# Altium PCB PCB1.PcbDoc
Units mil, origin at the board's own origin, x right, y up, seen from the top; angles counter-clockwise.
Board outline 6000 x 4000 mil, 2 copper layers (Top Layer, Bottom Layer); 46 components, 103 nets, 210 pads, 0 vias.
Unrouted connection lines stored in the file: 99.
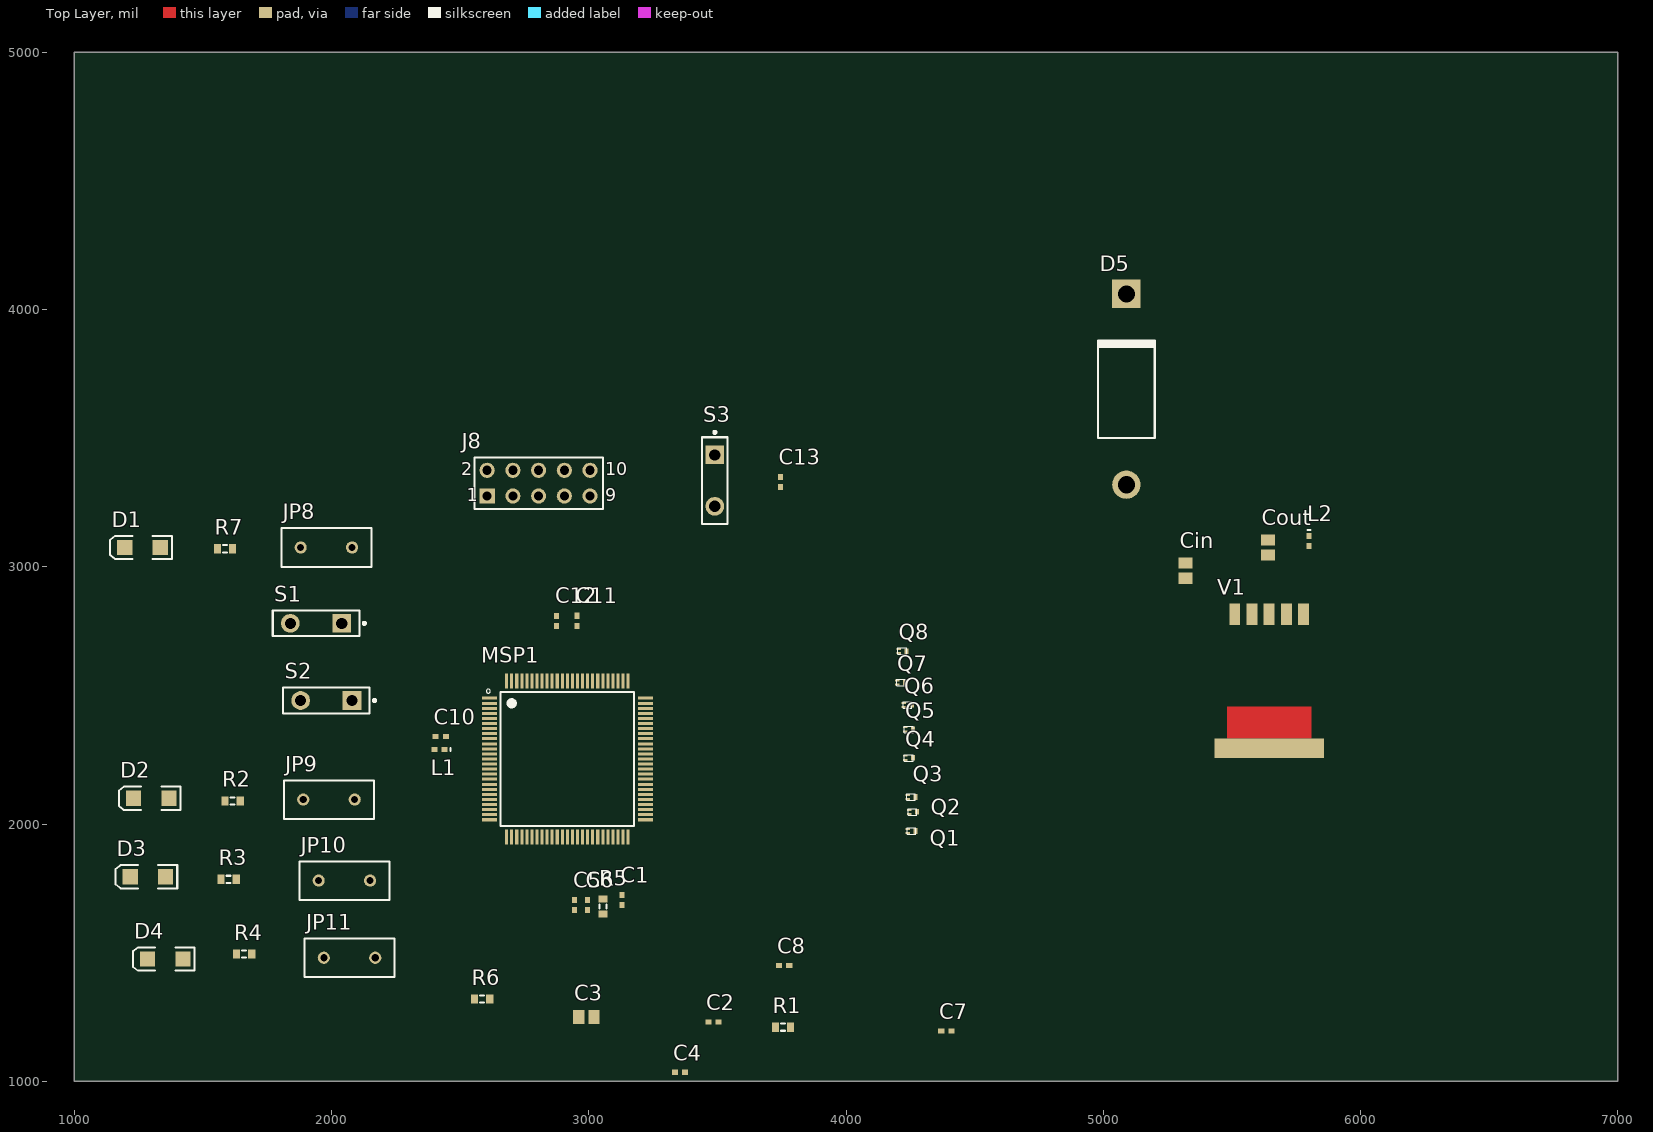
[diagram p0: Top Layer view]
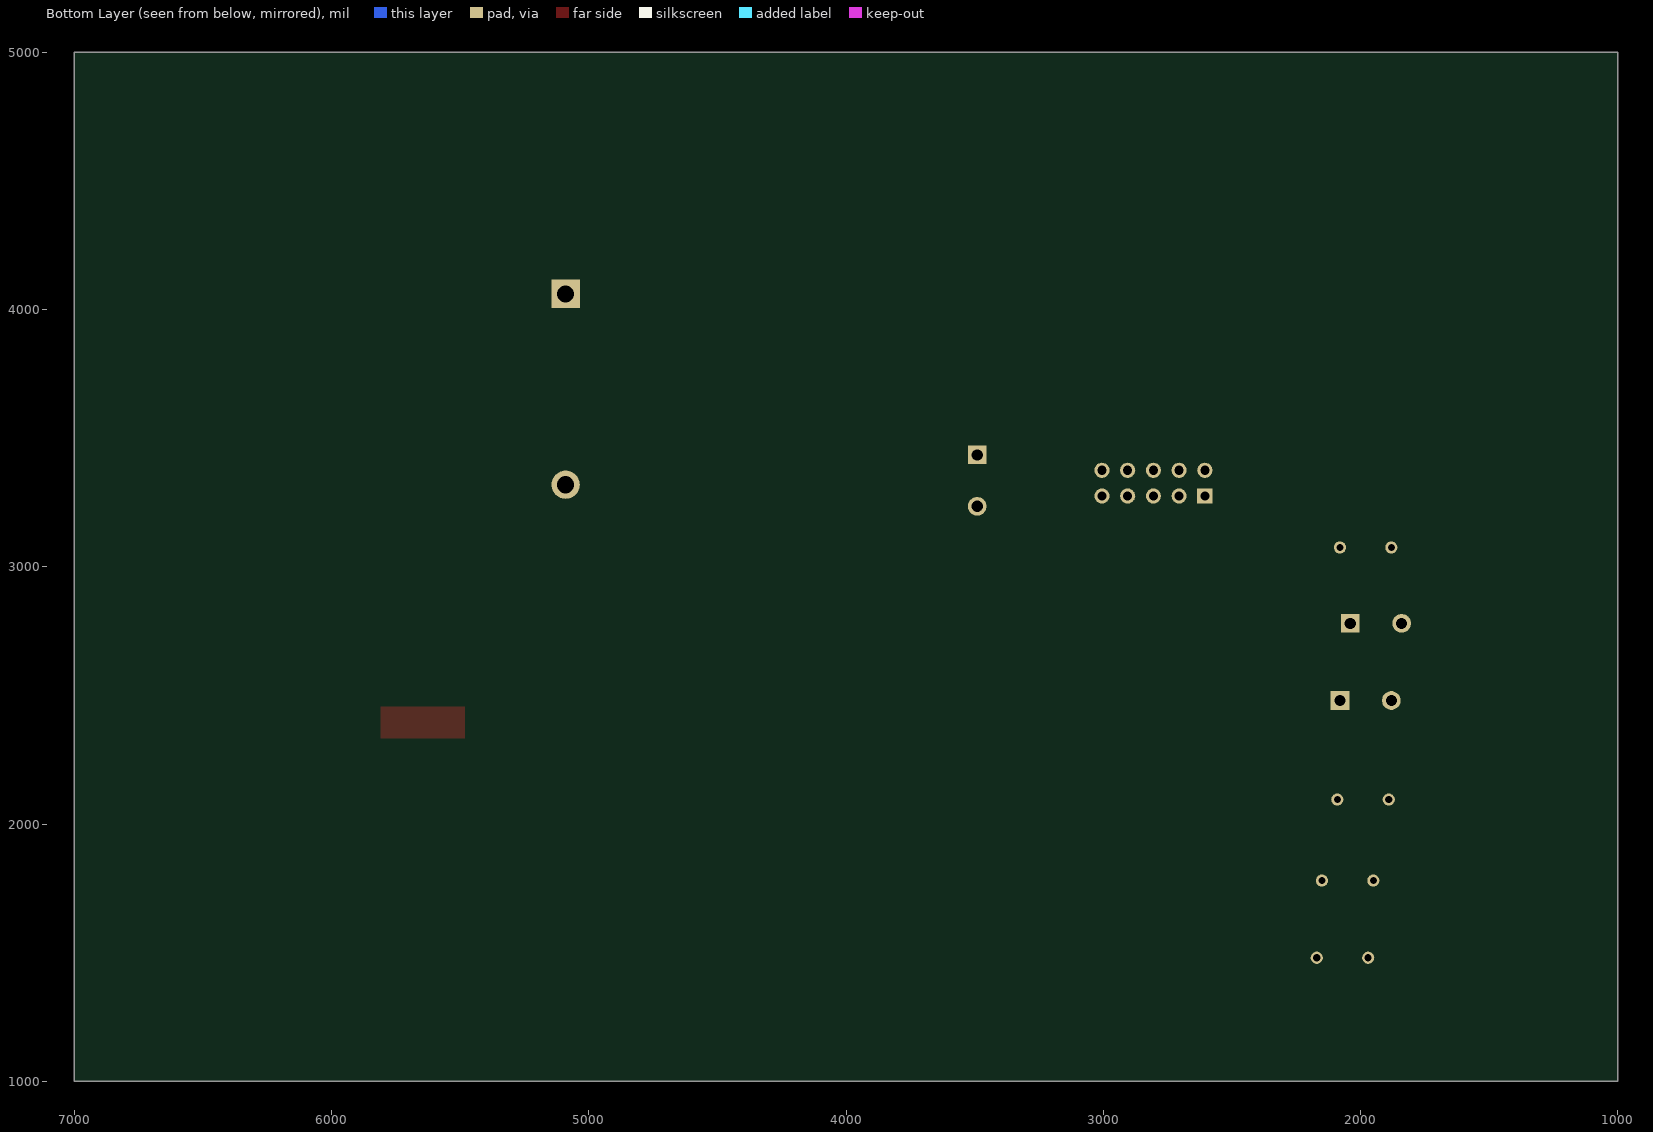
[diagram p1: Bottom Layer view, seen from below]

## Layer stack, top to bottom
Top Solder: solder mask 0.4, Solder Resist, Dk 3.5
Top Layer: signal copper 1.4
Dielectric 1: dielectric 12.6, FR-4, Dk 4.8
Bottom Layer: signal copper 1.4
Bottom Solder: solder mask 0.4, Solder Resist, Dk 3.5

## Board outline
1000,1000 7000,1000 7000,5000 1000,5000

## Design rules (kind name [scope] priority, off if disabled: settings)
Clearance [All] p1: gap=10 ignorepadtopadclearanceinfootprint=FALSE except(0: Arc-Hole Track-Hole SMDPad-Hole THPad-Hole Via-Hole Fill-Hole Poly-Hole Region-Hole Text-Hole; 5: SMDPad-SMDPad)
PolygonConnect [All] p1: connectstyle=Relief reliefconductorwidth=10 reliefentries=4 polygonreliefangle="90 Angle" airgapwidth=10
RoutingVias [All] p1: holewidth=28 width=50 viastyle="Through Hole" minholewidth=28 minwidth=50 maxholewidth=28 maxwidth=50
SolderMaskExpansion [All] p1: expansion=4
Width [All] p1: maxlimit=10 minlimit=10 preferedwidth=10
30 further rules are at their usual default settings.

## Classes and differential pairs
component class Sheet2: * C13 Cin Cout D1 D2 D3 D4 D5 J8 JP8 JP9 JP10 JP11 L2 Q1 Q2 Q3 Q4 Q5 Q6 Q7 Q8 R2 R3 R4 R6 R7 S1 S2 S3 V1
component class Sheet1: C1 C2 C3 C4 C5 C6 C7 C8 C10 C11 C12 L1 MSP1 Q9 Q10 R1 R5

## Components (designator, comment, footprint, x,y, rotation, side; value= is the part's Value field where it differs from the comment)
C1 "Cap Semi" 0402 3130,1705 r90 top value=100nF
C2 "Cap Semi" 0402 3484.68,1230 r0 top value=100nF
C3 "Cap Pol3" C0805 2990.47,1250 r0 top value=10uF
C4 "Cap Semi" 0402 3355,1035 r0 top value=100nF
C5 "Cap Semi" 0402 2945,1685.32 r270 top value=22pF
C6 "Cap Semi" 0402 2995,1684.68 r90 top value=22pF
C7 "Cap Semi" 0402 4390,1195 r0 top value=100nF
C8 "Cap Semi" 0402 3759.68,1450 r0 top value=100nF
C10 "Cap Semi" 0402 2424.69,2340 r180 top value=4.7uF
C11 "Cap Semi" 0402 2955,2790 r270 top value=22pF
C12 "Cap Semi" 0402 2875,2789.69 r270 top value=22pF
C13 "Cap Semi" 0402 3745,3330 r90 top value=1nF
Cin "Cap Pol3" C0805 5320,2985 r270 top value=220uF
Cout "Cap Pol3" C0805 5640,3075 r270 top value=120uF
D1 "LED2" 3.2X1.6X1.1 1265,3075 r180 top
D2 "LED2" 3.2X1.6X1.1 1298.9,2100 r180 top
D3 "LED2" 3.2X1.6X1.1 1286.1,1795 r180 top
D4 "LED2" 3.2X1.6X1.1 1353.9,1475 r180 top
D5 "1N5822" DO-201AD 5090,3690 r90 top
J8 "Header 5X2" HDR2X5 2605,3275 r0 top
JP8 "Jumper" RAD-0.2 1980,3075 r180 top
JP9 "Jumper" RAD-0.2 1990,2095 r180 top
JP10 "Jumper" RAD-0.2 2050,1780 r180 top
JP11 "Jumper" RAD-0.2 2070,1480 r180 top
L1 "Inductor" 0402-A 2420,2290 r180 top value=4.7uH
L2 "Inductor" 0402-A 5800,3100 r270 top value=68uH
MSP1 "MSP432P401R" MSP432P401R 2916.85,2252.8 r0 top
Q1 "MOSFET-N" SiUD41ED 4237.15,1960.1 r0 top
Q2 "MOSFET-N" SiUD41ED 4242.15,2034.3 r0 top
Q3 "MOSFET-N" SiUD41ED 4236.5,2092.2 r0 top
Q4 "MOSFET-N" SiUD41ED 4227.15,2244.3 r0 top
Q5 "MOSFET-N" SiUD41ED 4227.15,2355.1 r0 top
Q6 "MOSFET-N" SiUD41ED 4222.15,2450.1 r0 top
Q7 "MOSFET-N" SiUD41ED 4196.5,2537.2 r0 top
Q8 "MOSFET-N" SiUD41ED 4202.15,2659.3 r0 top
R1 "Res3" J1-0603 3755.47,1210 r0 top value=0
R2 "Res3" J1-0603 1615.47,2090 r180 top value=110
R3 "Res3" J1-0603 1600,1785 r180 top value=16
R4 "Res3" J1-0603 1660.47,1495 r180 top value=24
R5 "Res3" J1-0603 3055,1679.53 r270 top value=91K
R6 "Res3" J1-0603 2585.47,1320 r180 top value=47k
R7 "Res3" J1-0603 1585.47,3070 r180 top value=470
S1 "SW-PB" SPST-2 1940,2780 r180 top
S2 "SW-PB" SPST-2 1980,2480 r180 top
S3 "SW-PB" SPST-2 3490,3335 r270 top
V1 "LM2595S-3.3/NOPB-ND" LM2595S-3.3/NOPB-ND 5645,2257.5 r90 top

## Footprints (in the part's own frame and the unit in brackets; to place one, negate y for a bottom-side part, rotate by r counter-clockwise, add the part's x,y. Pads: shape width x height; smd on the part's side, far side on the other; paste and mask are expansions set on the pad)
3.2X1.6X1.1 [mm] "SMT LED; 2 Flat Leads"
  rect 1.5x1.5 smd: 1(-1.75,0) 2(1.75,0)
  silkscreen extent -2.9,-1.15 3.2,1.15
0402 [mm] "Chip Capacitor, Body 1.0x0.5mm, IPC High Density"
  rect 0.6x0.5 smd: 1(-0.5,0) 2(0.5,0)
  body extent -0.55,-0.3 0.55,0.3, height 1.3
0402-A [mm] "Chip Inductor, Body 1.0x0.5mm, IPC High Density"
  rect 0.6x0.5 smd: 1(-0.5,0) 2(0.5,0)
  silkscreen extent -1.1,-0.15 -1.1,0.15, body extent -0.55,-0.3 0.55,0.3, height 0.55
C0805 [mm] "Chip Capacitor, Body 2.0x1.3mm, IPC High Density"
  rect 1.1x1.4 smd: 1(-0.75,0) 2(0.75,0)
  body extent -1.1,-0.72 1.1,0.72, height 1.4
DO-201AD [mm] "Diode, Axial; Body 9.5 x 5.6 mm (LxDia. max), Lead Dia. 1.32 mm (max)"
  round 2.8 hole 1.7: 1(-9.42,0)
  rect 2.8x2.8 hole 1.7: 2(9.42,0)
  silkscreen extent -4.8,-2.8 4.9,2.8
HDR2X5 [mm] "Connector; Header; 5x2 Position"
  rect 1.5x1.5 hole 0.9: 1(0,0)
  round 1.5 hole 0.9: 2(0,2.54) 3(2.54,0) 4(2.54,2.54) 5(5.08,0) 6(5.08,2.54) 7(7.62,0) 8(7.62,2.54) 9(10.16,0) 10(10.16,2.54)
  silkscreen extent -1.27,-1.27 11.43,3.81
J1-0603 [mm] "Chip Resistor, Body 1.6x0.8mm, IPC High Density"
  rect 0.7x0.9 smd: 1(-0.75,0) 2(0.75,0)
  silkscreen extent -0.2,-0.35 0.2,0.35, body extent -0.85,-0.48 0.85,0.48, height 0.9
LM2595S-3.3/NOPB-ND [mil]
  rect 85x42 smd: 1(558,-134) 2(558,-67) 3(558,0) 4(558,67) 5(558,134)
  rect 75x425 smd mask+0: 3(37.5,0)
  Top Layer region: 75,-164 200,-164 200,164 75,164
MSP432P401R [mm]
  rect 1.5x0.3 smd: 1(-7.7,6) 2(-7.7,5.5) 3(-7.7,5) 4(-7.7,4.5) 5(-7.7,4) 6(-7.7,3.5) 7(-7.7,3) 8(-7.7,2.5) 9(-7.7,2) 10(-7.7,1.5) 11(-7.7,1) 12(-7.7,0.5) 13(-7.7,0) 14(-7.7,-0.5) 15(-7.7,-1) 16(-7.7,-1.5) 17(-7.7,-2) 18(-7.7,-2.5) 19(-7.7,-3) 20(-7.7,-3.5) 21(-7.7,-4) 22(-7.7,-4.5) 23(-7.7,-5) 24(-7.7,-5.5) 25(-7.7,-6) 51(7.7,-6) 52(7.7,-5.5) 53(7.7,-5) 54(7.7,-4.5) 55(7.7,-4) 56(7.7,-3.5) 57(7.7,-3) 58(7.7,-2.5) 59(7.7,-2) 60(7.7,-1.5) 61(7.7,-1) 62(7.7,-0.5) 63(7.7,0) 64(7.7,0.5) 65(7.7,1) 66(7.7,1.5) 67(7.7,2) 68(7.7,2.5) 69(7.7,3) 70(7.7,3.5) 71(7.7,4) 72(7.7,4.5) 73(7.7,5) 74(7.7,5.5) 75(7.7,6)
  rect 0.3x1.5 smd: 26(-6,-7.7) 27(-5.5,-7.7) 28(-5,-7.7) 29(-4.5,-7.7) 30(-4,-7.7) 31(-3.5,-7.7) 32(-3,-7.7) 33(-2.5,-7.7) 34(-2,-7.7) 35(-1.5,-7.7) 36(-1,-7.7) 37(-0.5,-7.7) 38(0,-7.7) 39(0.5,-7.7) 40(1,-7.7) 41(1.5,-7.7) 42(2,-7.7) 43(2.5,-7.7) 44(3,-7.7) 45(3.5,-7.7) 46(4,-7.7) 47(4.5,-7.7) 48(5,-7.7) 49(5.5,-7.7) 50(6,-7.7) 76(6,7.7) 77(5.5,7.7) 78(5,7.7) 79(4.5,7.7) 80(4,7.7) 81(3.5,7.7) 82(3,7.7) 83(2.5,7.7) 84(2,7.7) 85(1.5,7.7) 86(1,7.7) 87(0.5,7.7) 88(0,7.7) 89(-0.5,7.7) 90(-1,7.7) 91(-1.5,7.7) 92(-2,7.7) 93(-2.5,7.7) 94(-3,7.7) 95(-3.5,7.7) 96(-4,7.7) 97(-4.5,7.7) 98(-5,7.7) 99(-5.5,7.7) 100(-6,7.7)
  silkscreen extent -8,-6.6 6.6,6.9
RAD-0.2 [mm] "Radial Cap, Thru-Hole; 2 Leads; 0.2 in Pin Spacing"
  round 1.2 hole 0.7: 1(-2.54,0) 2(2.54,0)
  silkscreen extent -4.44,-1.91 4.44,1.91
SiUD41ED [mil] "N-Channel MOSFET"
  rect 17.5x7.1 smd mask+1: 1(2.85,20.7) 2(2.85,4.9)
  rect 15.8x21.7 smd mask+1: 3(33.5,12.8)
  silkscreen extent 0,0 34,26
SPST-2 [mm] "Switch; 2 Leads"
  rect 1.85x1.85 hole 1.1: 1(-2.54,0)
  round 1.85 hole 1.1: 2(2.54,0)
  silkscreen extent -4.89,-1.27 4.28,1.27

## Part data
C1 C2 C4 C5 C6 C7 C8 C10 C11 C12 C13: "Capacitor (Semiconductor SIM Model)", LatestRevisionDate=29-May-2009, LatestRevisionNote="IPC-7351 Footprint Added.", PackageDescription="Chip Capacitor", PackageReference=C1206, Published=8-Jun-2000, Publisher="Altium Limited"
C3 Cin Cout: "Polarized Capacitor (Surface Mount)", LatestRevisionDate=29-May-2009, LatestRevisionNote="IPC-7351 Footprint Added.", PackageDescription="Chip Capacitor", PackageReference=C0805, Published=8-Jun-2000, Publisher="Altium Limited"
D1 D2 D3 D4: "Typical RED, GREEN, YELLOW, AMBER GaAs LED", LatestRevisionDate=17-Jul-2002, LatestRevisionNote="Re-released for DXP Platform.", PackageDescription="SM LED; 2 Flat Leads", PackageReference=3.2X1.6X1.1, PackageVersion=Feb-2002, Published=8-Jun-2000, Publisher="Altium Limited"
D5: library part "Diode 1N5408", "3 Amp Medium Power Silicon Rectifier Diode", ComponentLink1Description="Manufacturer Link", ComponentLink1URL=http://www.irf.com/, DatasheetVersion=Aug-1984, LatestRevisionDate=17-Jul-2002, LatestRevisionNote="Re-released for DXP Platform.", PackageDescription="Diode, Axial; Body 9.5 x 5.3 mm (LxDia. max), Lead Dia. 1.32 mm (max)", PackageReference=DO-201AD, Published=8-Jun-2000, Publisher="Altium Limited"
J8: "Header, 5-Pin, Dual row", LatestRevisionDate=17-Jul-2002, LatestRevisionNote="Re-released for DXP Platform.", Publisher="Altium Limited"
JP8 JP9 JP10 JP11: "Jumper Wire", LatestRevisionDate=17-Jul-2002, LatestRevisionNote="Re-released for DXP Platform.", PackageDescription="Radial Cap, Thru-Hole; 2 Leads; 0.2 in Pin Spacing", PackageReference=RAD-0.2, Published=24-Mar-1999, Publisher="Altium Limited"
Q1 Q2 Q3 Q4 Q5 Q6 Q7 Q8: library part SiUD41ED
R1 R2 R3 R4 R5 R6 R7: "Resistor", LatestRevisionDate=29-May-2009, LatestRevisionNote="IPC-7351 Footprint Added.", PackageDescription="Chip Resistor", PackageReference=J1-0603, Published=8-Jun-2000, Publisher="Altium Limited"
S1 S2 S3: "Switch", LatestRevisionDate=17-Jul-2002, LatestRevisionNote="Re-released for DXP Platform.", PackageDescription="Switch; 2 Leads", PackageReference=SPST-2, Published=24-Mar-1999, Publisher="Altium Limited"
L1 L2: Code_IEC=1005, Code_JEITA=0402, LatestRevisionDate=29-May-2009, LatestRevisionNote="IPC-7351 Footprint Added.", PackageDescription="Chip Inductor", PackageReference=0402-A, Published=8-Jun-2000, Publisher="Altium Limited"

## Nets (pads, with @x,y where several pads share a name; then routed paths per layer and width w, separated by ;. In a path a pad name is that pad's centre, name@x,y a point inside that pad or via, vN(x,y) a via of type N, cw(c..) or ccw(c..) an arc to the next point about the centre after c; other vN are vias at no path point)
+3V3: C3.1 C4.2 C7.2 Cout.1 J8.1 L2.2 MSP1.13 MSP1.73 R1.2 R6.2 V1.4
DCOR: MSP1.44 R5.1
GND: C1.1 C2.1 C3.2 C4.1 C5.1 C6.1 C7.1 C8.1 C10.1 C11.1 C12.1 C13.1 Cin.2 Cout.2 D1.2 D2.2 D3.2 D4.2 D5.1 J8.3 J8.5 J8.7 J8.9 MSP1.15 MSP1.40 MSP1.43 MSP1.72 MSP1.82 MSP1.84 R5.2 S1.2 S2.2 S3.2 V1.3 V1.5
NetC1_2: C1.2 C2.2 MSP1.45 MSP1.87 R1.1
NetC5_2: C5.2 MSP1.41
NetC6_2: C6.2 MSP1.42
NetC11_2: C11.2 MSP1.85
NetC12_2: C12.2 MSP1.86
NetD1_1: D1.1 R7.2
NetD2_1: D2.1 R2.2
NetD3_1: D3.1 R3.2
NetD4_1: D4.1 R4.2
NetD5_2: D5.2 L2.1 V1.1
NetJ8_4: J8.4 MSP1.95
NetJP8_2: JP8.2 R7.1
NetJP9_2: JP9.2 R2.1
NetJP10_2: JP10.2 R3.1
NetJP11_2: JP11.2 R4.1
P1.0_LED1: JP8.1 MSP1.4
P1.1_BUTTON1: MSP1.5 S1.1
P1.2_BCLUART_RXD: MSP1.6
P1.3_BCLUART_TXD: MSP1.7
P1.4_BUTTON2: MSP1.8 S2.1
P1.5_SPICLK_J1.7: MSP1.9
P1.6_SPIMOSI_J2.15: MSP1.10
P1.7_SPIMISO_J2.14: MSP1.11
P2.0_RGBLED_RED: JP9.1 MSP1.16
P2.0_RGBLEQ_BLUE: JP11.1 MSP1.18
P2.0_RGBLEQ_GREEN: JP10.1 MSP1.17
P2.3_IO_J4.34: MSP1.19
P2.4_PWM_J4.38: MSP1.20
P2.5_PWM_J2.19: MSP1.21
P2.6_PWM_J4.39: MSP1.22
P2.7_PWM_J4.40: MSP1.23
P3.0_IO_J2.18: MSP1.32
P3.1: MSP1.33
P3.2_URXD_J1.3: MSP1.34
P3.3_UTXD_J1.4: MSP1.35
P3.4: MSP1.36
P3.5_IO_J4.32: MSP1.37
P3.6_IO_J2.11: MSP1.38
P3.7_IO_J4.31: MSP1.39
P4.0_A13_J3.24: MSP1.56 Q1.1
P4.1_IO_J1.5: MSP1.57 Q2.1
P4.2_A11_J3.25: MSP1.58 Q3.1
P4.3_A10_J1.6: MSP1.59 Q4.1
P4.4_A9_J3.26: MSP1.60 Q5.1
P4.5_A8_J3.27: MSP1.61 Q6.1
P4.6_IO_J1.8: MSP1.62 Q7.1
P4.7_A6_J3.28: MSP1.63 Q8.1
P5.0_IO_J2.13: MSP1.64
P5.1_IO_J4.33: MSP1.65
P5.2_IO_J2.12: MSP1.66
P5.3: MSP1.67
P5.4_IO_J3.29: MSP1.68
P5.5_IO_J3.30: MSP1.69
P5.6_PWM_J4.37: MSP1.70
P5.7_IO_J2.17: MSP1.71
P6.0_A15_J1.2: MSP1.54
P6.1_A14_J3.23: MSP1.55
P6.2: MSP1.76
P6.3: MSP1.77
P6.4_I2CSDA_J1.10: MSP1.78
P6.5_I2CSCL_J1.9: MSP1.79
P6.6_CAPTURE_J4.36: MSP1.80
P6.7_CAPTURE_J4.35: MSP1.81
P7.0: MSP1.88
P7.1: MSP1.89
P7.2: MSP1.90
P7.3: MSP1.91
P7.4: MSP1.26
P7.5: MSP1.27
P7.6: MSP1.28
P7.7: MSP1.29
P8.0: MSP1.30
P8.1: MSP1.31
P8.2: MSP1.46
P8.3: MSP1.47
P8.4: MSP1.48
P8.5: MSP1.49
P8.6: MSP1.50
P8.7: MSP1.51
P9.0: MSP1.52
P9.1: MSP1.53
P9.2: MSP1.74
P9.3: MSP1.75
P9.4: MSP1.96
P9.5: MSP1.97
P9.6: MSP1.98
P9.7: MSP1.99
P10.0: MSP1.100
P10.1: MSP1.1
P10.2: MSP1.2
P10.3: MSP1.3
P10.4: MSP1.24
P10.5: MSP1.25
RST: C13.2 J8.10 MSP1.83 R6.1 S3.1
TDI: J8.8 MSP1.92
TDO_SWO: J8.6 MSP1.93
TMS_SWDIO: J8.2 MSP1.94
VCC: Cin.1 Q1.3 Q2.3 Q3.3 Q4.3 Q5.3 Q6.3 Q7.3 Q8.3 V1.2
VCORE: C8.2 C10.2 L1.2 MSP1.12
VSW: L1.1 MSP1.14
pads on no net: Q1.2 Q2.2 Q3.2 Q4.2 Q5.2 Q6.2 Q7.2 Q8.2

## Text inside footprints (layer, text, board x,y; h text height)
J8: Top Overlay "10" at 3065,3355 h50; Top Overlay "9" at 3065,3255 h50; Top Overlay "1" at 2525,3255 h50; Top Overlay "2" at 2505,3355 h50